# Altium PCB I-RING V1.0.pcbdoc
Units mil, origin at the board's own origin, x right, y up, seen from the top; angles counter-clockwise.
Board outline 1170.48 x 1480.27 mil, 2 copper layers (Top Layer, Bottom Layer); 42 components, 29 nets, 170 pads, 57 vias.
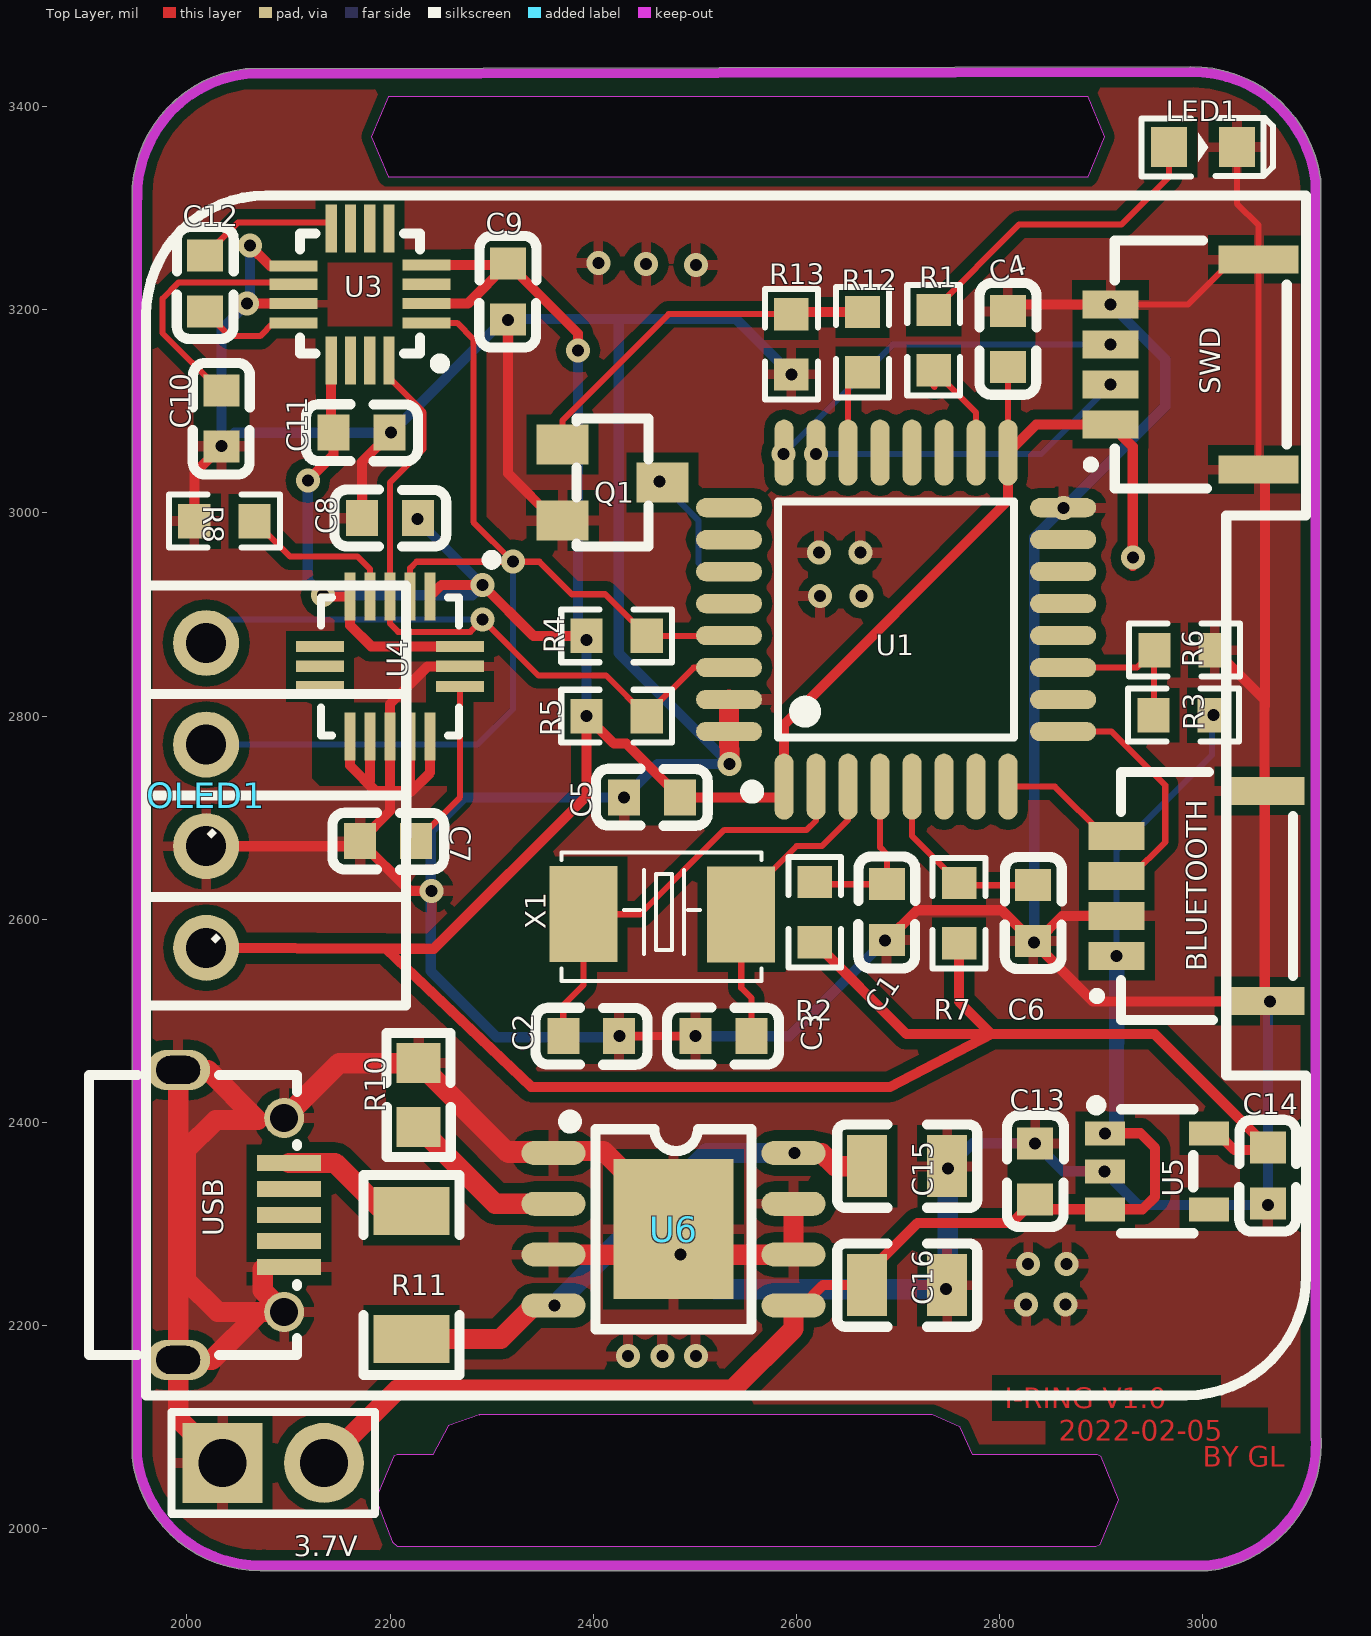
[diagram p0: Top Layer view]
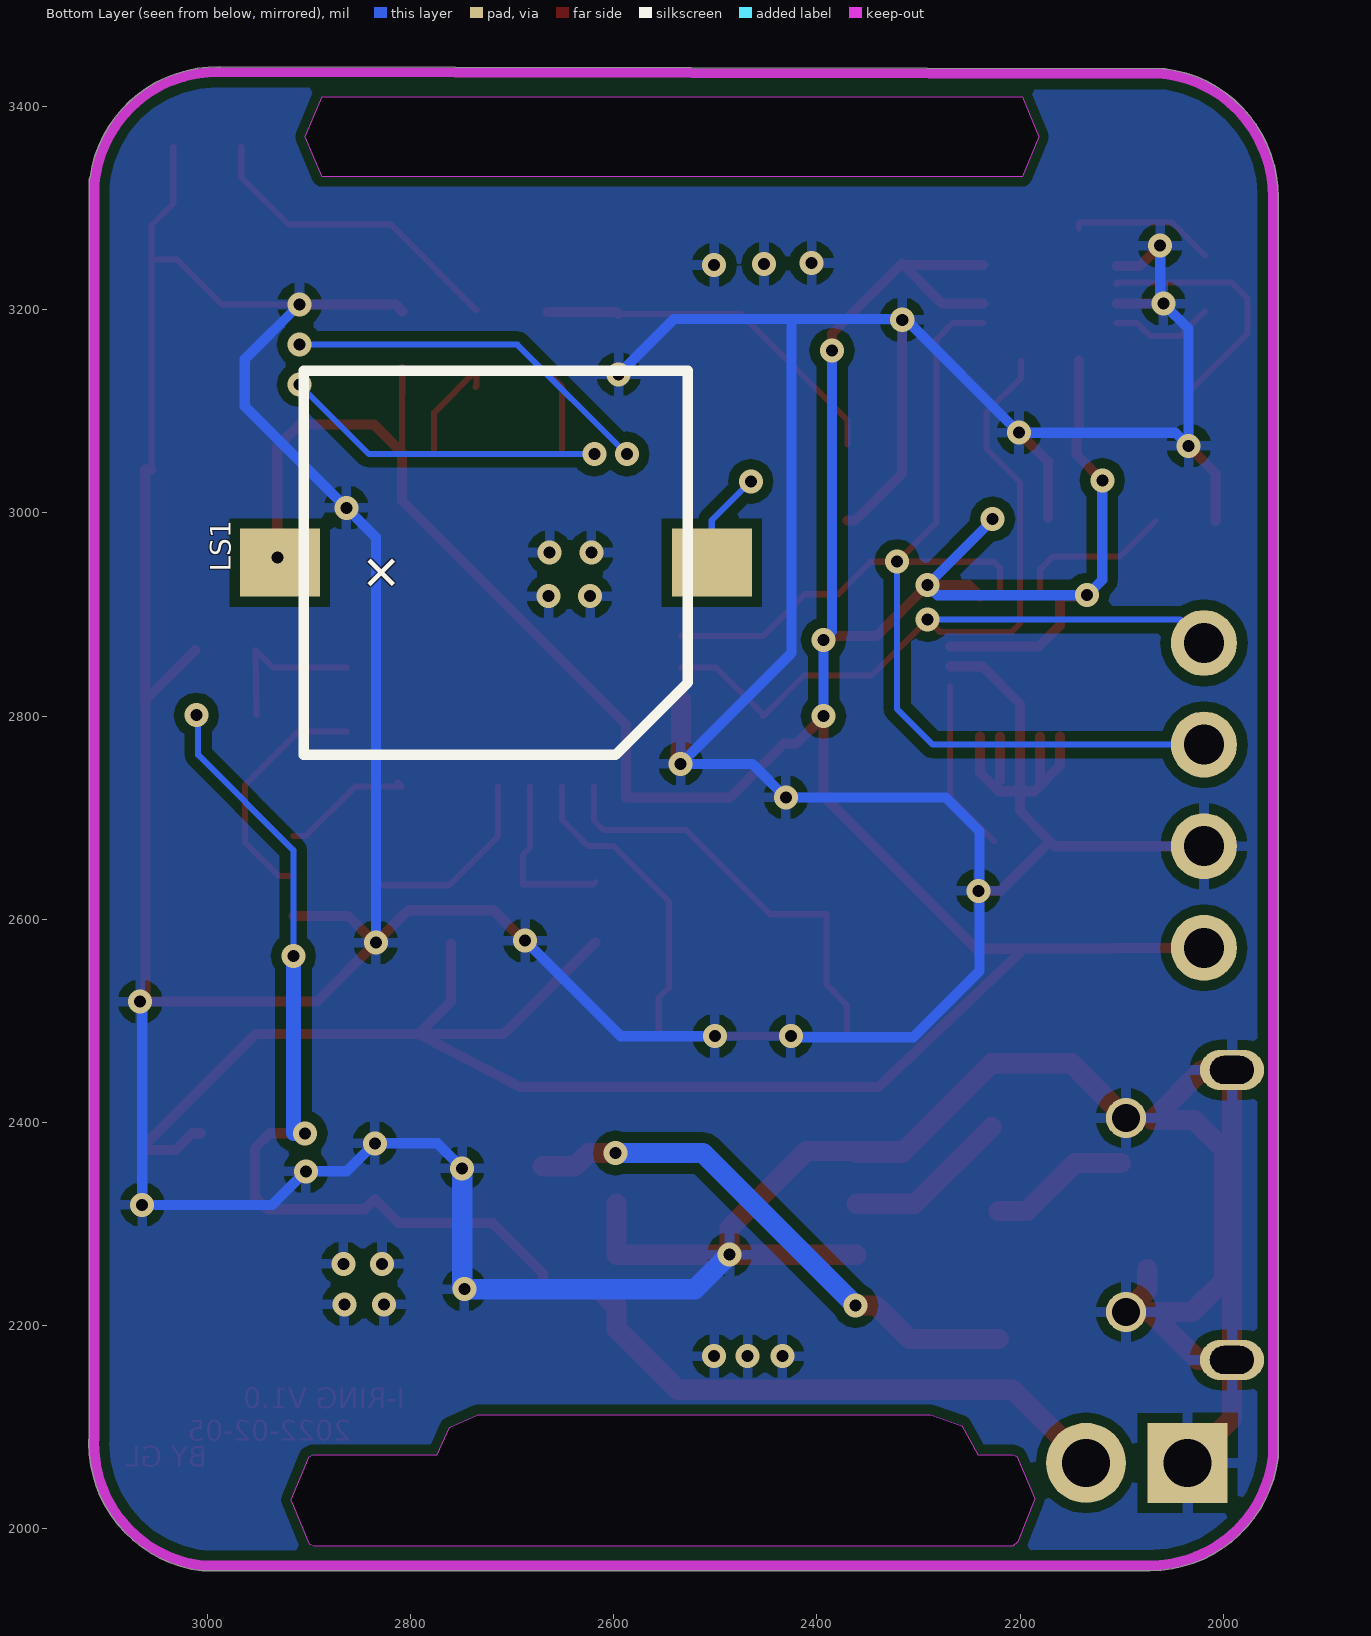
[diagram p1: Bottom Layer view, seen from below]

## Layer stack, top to bottom
Top Solder: solder mask 0.4, Solder Resist, Dk 3.5
Top Layer: signal copper 1.4
Dielectric1: dielectric 12.6, FR-4, Dk 4.8
Bottom Layer: signal copper 1.4
Bottom Solder: solder mask 0.4, Solder Resist, Dk 3.5

## Board outline
1946.02,2070.4 ccw(c2071.57,2085.53) 2072.05,1959.08 ccw(c2073,1964) 2073,1958.98 3004.54,1958.76 ccw(c3004.54,1963.77) 3004.54,1958.76 ccw(c3004.54,1963.77) 3005.14,1958.79 ccw(c2990.01,2084.34) 3116.47,2084.34 ccw(c2990.01,2084.34) 3116.42,2087.95 ccw(c3111.4,2087.81) 3116.01,2089.78 3116.01,3327.8 ccw(c3111,3327.8) 3115.36,3330.29 ccw(c2990.14,3312.59) 2988.19,3439.03 ccw(c2988.26,3434.02) 2988.04,3439.03 2059.22,3437.02 ccw(c2057.97,3432.16) 2057.37,3437.14 ccw(c2072.5,3311.6) 1946.05,3310.79 ccw(c1951,3310) 1945.98,3310 1945.98,2071 ccw(c1951,2071)
cut-out: 2202.05,1987.16 2207,1982.99 2894.72,1982.99 2898.83,1985.14 2899.52,1985.72 2917.3,2028.63 2899.78,2071.29 2895.97,2073.04 2773.56,2073.04 2761.15,2100.22 2733.87,2112.4 2733.13,2112.39 2288.01,2112.39 2288.08,2112.39 2257.35,2101.55 2241.75,2073.02 2207,2073.02 2203.45,2071.55 2185.68,2029.64
cut-out: 2198,3331 2886.98,3331 2903.28,3370.37 2886.98,3409.74 2198,3409.74 2181.69,3370.37

## Design rules (kind name [scope] priority, off if disabled: settings)
Clearance [All] p1: gap=10
PolygonConnect [All] p1: connectstyle=Relief reliefconductorwidth=10 reliefentries=4 polygonreliefangle="90 Angle" airgapwidth=10
RoutingVias [All] p1: holewidth=28 width=50 viastyle="Through Hole" minholewidth=28 minwidth=50 maxholewidth=28 maxwidth=50
SolderMaskExpansion [All] p1: expansion=4
Width [All] p1: maxlimit=10 minlimit=10 preferedwidth=10
30 further rules are at their usual default settings.

## Components (designator, comment, footprint, x,y, rotation, side; value= is the part's Value field where it differs from the comment)
3.7V "3.7V 400mAH" HDR-TH_2P-P2.54-V-M 2085,2065 r0 top
BLUETOOTH "BLUETOOTH" CONN-SMD_SH1.0X4 2988,2623.01 r90 top
C1 "104" C0603 2689,2607 r90 top
C2 "20pF" C0603 2398,2485 r180 top
C3 "20pF" C0603 2528,2485 r0 top
C4 "104" C0603 2808,3171 r270 top
C5 "104" C0603 2458,2720 r0 top
C6 "104" C0603 2833,2606 r270 top
C7 "104" C0603 2198,2677 r180 top
C8 "104" C0603 2200,2995 r180 top
C9 "0.1u" C0603 2316,3218 r90 top
C10 "4.7uF" C0603 2034,3093 r90 top
C11 "104" C0603 2172,3079 r180 top
C12 "0.22uF" C0603 2018,3226 r270 top
C13 "104" C0603 2835,2352 r270 top
C14 "104" C0603 3064,2348 r90 top
C15 "10uF" C0805 2709,2357 r0 top
C16 "10uF" C0805 2709,2240 r0 top
LED1 "LED-0603_B" LED0603_BLUE 3000,3360 r0 top
LS1 "BEEP" HN9650B 2527,2762 r270 bottom
OLED1 "0.96OLED_4P_MODULE_JX" 0.96OLED_4P 2019,2722 r90 top
Q1 "j3y" J3Y 2419,3030 r180 top
R1 "4.7K" R0603#1 2735,3170 r270 top
R2 "10K" R0603#1 2618,2607 r270 top
R3 "10K" R0603#1 2981,2801 r0 top
R4 "4.7K" R0603#1 2423,2879 r0 top
R5 "4.7K" R0603#1 2423,2800 r0 top
R6 "10K" R0603#1 2982,2865 r180 top
R7 "0" R0603#1 2760,2606 r270 top
R8 "4.7k" R0603#1 2037,2992 r180 top
R10 "4.7K" R0603#2 2228,2427 r270 top
R11 "0.25" R1206 2221,2250 r270 top
R12 "4.7k" R0603#1 2665,3168 r270 top
R13 "4.7k" R0603#1 2595,3166 r270 top
SWD "SWD" CONN-SMD_SH1.0X4 2982,3146.01 r90 top
U1 "STM32F030K6T6TR" LQFP-32_L7.0-W7.0-P0.80-LS9.0-TL 2698,2895 r90 top
U3 "C-HMC5883L" HMC 2169,3217 r180 top
U4 "ICM-20602" LGA-16_L3.0-W3.0-ICM20602 2200,2849 r180 top
U5 "RT9013-33GB" SOT-23-5_L3.0-W1.7-P0.95-LS2.8-BR 2955.01,2351.99 r180 top
U6 "TP4056X" SOP-8_L4.9-W3.9-P1.27-LS6.0-BL-EP 2479,2295 r270 top
USB "MICRO XNJ ZB" MICRO-USB-SMD_MICRO-XNJ-ZB 2046,2309 r90 top
X1 "8MHz" SMD-5032_2P 2468,2605 r0 top

## Footprints (in the part's own frame and the unit in brackets; to place one, negate y for a bottom-side part, rotate by r counter-clockwise, add the part's x,y. Pads: shape width x height; smd on the part's side, far side on the other; paste and mask are expansions set on the pad)
0.96OLED_4P [mm]
  round 1.65 hole 1: 1(-3.81,-0.001) 2(-1.27,0.002) 3(1.27,0.002) 4(3.81,0.002)
  silkscreen extent -15,-27.5 15,1.5
C0603 [mm]
  rect 0.8x0.9 smd: 1(-0.7,0) 2(0.7,0)
  silkscreen extent -1.41,-0.71 1.39,0.72
C0805 [mm]
  rect 1x1.55 smd: 1(-1,0) 2(1,0)
  silkscreen extent -1.75,-1.04 1.75,1.04
CONN-SMD_SH1.0X4 [mm]
  rect 0.7x1.4 smd: 1(-1.5,1.85) 2(-0.5,1.85) 3(0.5,1.85) 4(1.5,1.85)
  rect 0.7x2 smd: 5(-2.625,-1.85) 6(2.625,-1.85)
  silkscreen extent -3.1,-2.55 3.1,2.42
HDR-TH_2P-P2.54-V-M [mm]
  rect 2x2 hole 1.2: 1(-1.27,0)
  round 2 hole 1.2: 2(1.27,0)
  silkscreen extent -2.54,-1.27 2.54,1.27
HMC [mm]
  rect 1.2x0.28 smd: 1(-1.702,0.762) 2(-1.702,0.279) 3(-1.702,-0.203) 4(-1.702,-0.686) 9(1.626,-0.66) 10(1.626,-0.203) 11(1.626,0.279) 12(1.626,0.762)
  rect 0.28x1.2 smd: 5(-0.762,-1.6) 6(-0.279,-1.6) 7(0.203,-1.6) 8(0.686,-1.6) 13(0.686,1.702) 14(0.203,1.702) 15(-0.279,1.702) 16(-0.762,1.702)
  silkscreen extent -2.16,-1.47 1.47,1.9
HN9650B [mm]
  rect 1.7x2 smd: 1(-4.8,-10.2) 2(-4.8,0.6)
  silkscreen extent -9.6,-9.6 0,0
J3Y [mm]
  rect 1.3x1 smd: 1(1.25,-0.95) 2(1.25,0.95) 3(-1.25,0)
  silkscreen extent -0.9,-1.6 0.9,1.6
LED0603_BLUE [mm]
  rect 0.9x1 smd: 1(-0.85,0) 2(0.85,0)
  silkscreen extent -1.54,-0.73 1.75,0.73
LGA-16_L3.0-W3.0-ICM20602 [mm]
  rect 0.28x1.2 smd: 1(-1,-1.75) 2(-0.5,-1.75) 3(0,-1.75) 4(0.5,-1.75) 5(1,-1.75) 9(1,1.75) 10(0.5,1.75) 11(0,1.75) 12(-0.5,1.75) 13(-1,1.75)
  rect 1.2x0.28 smd: 6(1.75,-0.5) 7(1.75,0) 8(1.75,0.5) 14(-1.75,0.5) 15(-1.75,0) 16(-1.75,-0.5)
  silkscreen extent -2.66,-2.79 1.73,1.73
LQFP-32_L7.0-W7.0-P0.80-LS9.0-TL [mm]
  oval 1.65x0.48 smd: 1(-4.176,2.799) 2(-4.176,2) 3(-4.176,1.2) 4(-4.176,0.4) 5(-4.176,-0.4) 6(-4.176,-1.2) 7(-4.176,-2) 8(-4.176,-2.799) 17(4.176,-2.799) 18(4.176,-2) 19(4.176,-1.2) 20(4.176,-0.4) 21(4.176,0.4) 22(4.176,1.2) 23(4.176,2) 24(4.176,2.799)
  oval 0.48x1.65 smd: 9(-2.799,-4.176) 10(-2,-4.176) 11(-1.2,-4.176) 12(-0.4,-4.176) 13(0.4,-4.176) 14(1.2,-4.176) 15(2,-4.176) 16(2.799,-4.176) 25(2.799,4.176) 26(1.999,4.176) 27(1.199,4.176) 28(0.399,4.176) 29(-0.399,4.176) 30(-1.199,4.176) 31(-1.999,4.176) 32(-2.799,4.176)
  silkscreen extent -4.45,-2.95 2.95,3.75
MICRO-USB-SMD_MICRO-XNJ-ZB [mm]
  rect 0.4x1.6 smd: 1(1.3,-1.388) 2(0.65,-1.388) 3(0,-1.388) 4(-0.65,-1.388) 5(-1.3,-1.388)
  oval 1x1.6 hole 0.7 slot 1.1 at 90 deg: 6(-3.625,1.388) 6(3.625,1.388)
  round 1 hole 0.7: 6(-2.425,-1.262) 6(2.425,-1.262)
  silkscreen extent -3.5,-1.59 3.5,3.62
R0603#1 [mil]
  rect 31.75x34.02 smd: 1(-29.66,0) 2(29.66,0)
  silkscreen extent -55,-26 55,26
R0603#2 [mil]
  rect 39.37x43.31 smd: 1(-31.49,0) 2(31.49,0)
  silkscreen extent -61,-31 61,32
R1206 [mm]
  rect 1.2x1.9 smd: 1(-1.6,0) 2(1.6,0)
  silkscreen extent -2.5,-1.2 2.5,1.2
SMD-5032_2P [mm]
  rect 1.7x2.4 smd: 1(-1.971,0) 2(1.971,0)
  silkscreen extent -2.52,-1.67 2.48,1.55
SOP-8_L4.9-W3.9-P1.27-LS6.0-BL-EP [mm]
  oval 0.6x1.6 smd: 1(-1.905,-3) 2(-0.635,-3) 3(0.635,-3) 4(1.905,-3) 5(1.905,3) 6(0.635,3) 7(-0.635,3) 8(-1.905,3)
  rect 3.5x3 smd: 9(0,0)
  silkscreen extent -2.84,-2.74 2.5,1.95
SOT-23-5_L3.0-W1.7-P0.95-LS2.8-BR [mm]
  rect 1x0.6 smd: 1(1.3,-0.95) 2(1.3,0) 3(1.3,0.95) 4(-1.3,0.95) 5(-1.3,-0.95)
  silkscreen extent -0.9,-1.78 1.65,1.55

## Via types
v1: diameter 23.62, hole 11.81, Top Layer to Bottom Layer, 55 vias
v2: diameter 24, hole 12, Top Layer to Bottom Layer, 2 vias

## Nets (pads, with @x,y where several pads share a name; then routed paths per layer and width w, separated by ;. In a path a pad name is that pad's centre, name@x,y a point inside that pad or via, vN(x,y) a via of type N, cw(c..) or ccw(c..) an arc to the next point about the centre after c; other vN are vias at no path point)
+3.3V: C4.2 C5.2 C8.1 C9.2 C11.2 C14.2 LS1.1 OLED1.1 R2.2 R4.1 R5.1 R7.2 SWD.1 U1.1 U1.17 U3.2 U3.4 U3.13 U4.1 U4.5 U4.16 U5.5 | length 4386.7
  Top Layer w6: C4.2 2808,3116.2 2808.2,3116 U1.17
  Top Layer w10: OLED1.1@2019.1,2572 2196,2571 ; v1(2119,3032) 2144.44,3057.44 C11.2 2142,3081.44 U3.13 ; v1(2134,2919) 2135.1,2917.9 U4.5 2160.63,2889.37 2181.32,2868.68 U4.16 ; U3.2 2276.44,3206 C9.2 ; U3.4 2314.44,3244 C9.2 ; U4.1 2250.47,2929 v1(2291,2929) 2341,2879 R4.1@2393.35,2879 ; v1(2385,3160) 2385,3176.56 C9.2 ; R2.2 2708.34,2487 2792,2487 ; R7.2 2760,2519 2792,2487 ; v1@2931,2948 2931,3065.11 2909.16,3086.95 2835.74,3086.95 U1.17 2808.2,3012.2 2587.8,2791.8 U1.1 2587.8,2720 C5.2 2432.6,2773 2420.3,2773 v1(2393.34,2800) 2393.3,2721.3 2243,2571 2196,2571 ; U5.5 3014.6,2389.4 3031,2373 3061.44,2373 C14.2 2952.56,2487 2792,2487 ; 2196,2571 2339,2435 2692,2435 2792,2487
  Bottom Layer w10: v1(2119,3032) 2119,2934 v1(2134,2919) 2281,2919 v1(2291,2929) 2227,2993 v1(2227,2994) ; v1(2385,3160) 2385,2883.34 v1(2393.34,2875) v1(2393.34,2800)
  other v1: 2931,2955.98
+5V: R11.1 USB.1 | length 139.9
  Top Layer w20: USB.1 2145.82,2360.18 2193.01,2312.99 R11.1
ADC_IN: R3.1 R6.2 U1.11 | length 161.1
  Top Layer w6: U1.11 2935.11,2847.76 R6.2 ; R3.1@2951.4,2801 R6.2
BEEP: R12.2 U1.22 | length 84.8
  Top Layer w6: U1.22 2650.76,3124.1 R12.2
C7_1: C7.1 U4.14 | length 170.3
  Top Layer w6: C7.1 2268.9,2720.34 U4.14
C10_2: C10.2 U3.10 | length 253
  Top Layer w6: C10.2 2032.4,3120.6 1976,3177 1976,3211 1992,3227 2105,3227 U3.10
C12_1: C12.1 U3.8 | length 143.4
  Top Layer w6: C12.1 2050.4,3286 2142,3286 U3.8
C12_2: C12.2 U3.12 | length 118.6
  Top Layer w6: C12.2@2029.4,3187 C12.2 2042.4,3174 2072,3174 2085,3187 U3.12
FOSC1: C2.2 U1.2 X1.1 | length 428.7
  Top Layer w6: C2.2 2370.44,2515.44 2390.41,2535.41 X1.1 2446,2605 2529,2688 2610,2688 2619.3,2697.3 U1.2
FOSC2: C3.2 U1.3 X1.2 | length 308
  Top Layer w6: C3.2 2555.6,2522.6 2545.6,2532.5 X1.2 2545.6,2617.6 2600,2672 2625,2672 2650.8,2697.8 U1.3
GND: 3.7V.1 BLUETOOTH.2 BLUETOOTH.5 BLUETOOTH.6 C1.1 C2.1 C3.1 C4.1 C5.1 C6.2 C7.2 C8.2 C9.1 C10.1 C11.1 C13.1 C14.1 C15.2 C16.2 LED1.2 OLED1.2 Q1.2 R6.1 R8.2 R10.1 R13.2 SWD.4 SWD.5 SWD.6 U1.16 U1.31 U1.32 U3.9 U3.11 U4.9 U4.10 U4.11 U4.12 U4.13 U4.15 U5.2 U6.1 U6.3 U6.6 U6.7 U6.9 USB.5 USB.6 | length 8818
  Top Layer w6: v1(2909.2,3205.1) 2985.07,3205.07 3029.36,3249.36 SWD.6 ; LED1.2 3033.46,3304.54 3054.84,3283.16 SWD.6 ; SWD.5 SWD.6
  Top Layer w8: v1(2425.56,2485) v1(2500.44,2485)
  Top Layer w10: R8.2 2007.34,3038.78 C10.1 ; OLED1.2 2165.44,2672 C7.2 2219.44,2628 v1(2241,2628) ; v1(2059,3206) U3.11 ; v1(2062,3263) 2082,3243 U3.9 ; U4.9 2160.6,2751.4 2186,2726 2221,2726 2239.4,2744.4 U4.13 ; C7.2 2200,2706.6 2200,2736 U4.11 2200,2812 2237,2849 U4.15 ; C8.2 2172.44,3050.44 v1(2201,3079) ; 2180.31,2736 U4.10 ; 2219.68,2736 U4.12 ; C9.1 2316,3039 2362.4,2992.6 Q1.2 ; C1.1 2718.56,2609 2802,2609 v1(2834,2577) 2892,2519 v1(3066,2519) ; C4.1 2814.54,3205.1 v1(2909.2,3205.1) ; C6.2 2836.44,2578.44 2861.32,2603.32 BLUETOOTH.2 ; U1.16 2862.8,3005.2 v1(2863,3005) ; R6.1 3060.8,2815.8 BLUETOOTH.6@3060.8,2726.3 ; SWD.5@3055,3042.8 3061,3042.8 3061,2810 ; BLUETOOTH.5@3060.84,2519.65 BLUETOOTH.6
  Top Layer w20: 3.7V.1 1991.37,2108.63 USB.6@1991.37,2166.28 ; 2069.7,2211.53 2024.45,2166.28 USB.6@1991.37,2166.28 ; USB.5@2074.62,2255.82 2074.62,2234.61 2095.7,2213.53 2030.47,2213.53 1999,2245 1999,2373 2028.47,2402.47 2069.7,2402.47 2020.45,2451.72 1991.37,2451.72 1991.37,2190.28 USB.6@1991.37,2166.28 ; USB.6@2095.7,2404.47 2149.72,2458.49 R10.1 2316.49,2370 U6.1 ; 2316.9,2372 2410,2372 2486,2296 v1(2486,2270) ; U6.3 v1(2486,2270) ; U1.31 U1.32 v1(2534,2753) ; U6.7 U6.6 v1(2486,2270)
  Bottom Layer w10: v1(2062,3263) 2062,3209 v1(2059,3206) 2034,3181 v1(2034,3066) 2047,3079 v1(2201,3079) 2312,3190 v2(2316,3190) 2317,3191 2426,3191 ; v1(2425.56,2485) 2424.56,2484 2305,2484 2240,2549 2240,2687 2273,2720 v1(2430.44,2720) 2463.44,2753 v1(2534,2753) 2425,2862 2425,3191 2426,3191 ; v1(2500.44,2485) 2593,2485 v1(2687,2579) ; v1(2595,3136.34) 2540.34,3191 2426,3191 ; v1(2749,2355) 2773.56,2379.56 v1(2835,2379.56) 2862.56,2352 v1(2903,2352) 2936,2319 v1(3064,2319) 3064,2517 v1(3066,2519) ; 2834,2626 v1(2834,2577) 2834,2976 v1(2863,3005) 2963,3105 2963,3151.3 v1(2909.2,3205.1)
  Bottom Layer w20: v1(2486,2270) 2520,2236 v1(2747,2236) 2749,2238 v1(2749,2355)
  other v1: 2434,2170 2468,2170 2501,2170 2826,2221 2865,2221 2828,2261 2866,2261 2623,2918 2664,2918 2622,2961 2663,2961 2501,3244 2452,3245 2405,3246
  other v2: 2316,3190
LED: R1.2 U1.18 | length 115
  Top Layer w6: 2736,3124 2735,3125 R1.2 2776.74,3098.6 U1.18
LED1_1: LED1.1 R1.1 | length 315.2
  Top Layer w6: R1.1 2819.3,3284 2920,3284 2966.5,3330.5 LED1.1
LS1_2: LS1.2 Q1.3 | length 95.9
  Bottom Layer w6: v1(2465,3031) 2503.4,2992.6 LS1.2
NRST: C1.2 R2.1 U1.4 | length 170.7
  Top Layer w6: R2.1 2620.1,2634.56 C1.2 2689,2664 2682.25,2670.75 U1.4@2682.25,2730.6
NULL: 
Q1_1: Q1.1 R12.1 R13.1 | length 363.1
  Top Layer w6: Q1.1 2369.8,3091.1 2474.3,3195.7 R13.1
  Top Layer w10: R13.1 2597,3197.66 R12.1
RXD: BLUETOOTH.3 U1.9 | length 269.9
  Top Layer w6: U1.9@2892.2,2784.8 U1.9 2910.2,2784.8 2963,2732 2963,2676 2929.69,2642.69 BLUETOOTH.3
S$20193: 
SCL: OLED1.3 R4.2 U1.29 U3.1 U4.2 | length 1124.1
  Top Layer w6: U4.2 2219.68,2945.68 2226,2952 v1(2321,2952) ; U3.1 2266,3187 2282,3171 2282,2991 v1(2321,2952) ; R4.2 2533.3,2879 U1.29 ; R4.2 2411.7,2920 2379,2920 2347,2952 v1(2321,2952)
  Bottom Layer w6: OLED1.3 2286,2772 2321,2807 v1(2321,2952)
SDA: OLED1.4 R5.2 U1.30 U3.16 U4.3 | length 970.4
  Top Layer w6: U3.16 2199,3133 2233,3099 2233,3063 2200,3030 U4.3 2200,2891 2208,2883 2279,2883 v1(2291,2895) 2346,2840 2412.7,2840 R5.2 ; R5.2 2452.66,2801.66 2498.8,2847.8 U1.30
  Bottom Layer w6: OLED1.4 2041.95,2895 v1(2291,2895)
SWCLK: SWD.3 U1.24 | length 366.8
  Bottom Layer w6: v1(2587,3058) 2694.7,3165.7 v1(2909.17,3165.69)
SWDIO: SWD.2 U1.23 | length 318.5
  Bottom Layer w6: v1(2619,3058) 2840.84,3058 v1(2909.17,3126.32)
TXD: BLUETOOTH.4 U1.8 | length 133.3
  Top Layer w6: U1.8@2812.61,2735 U1.8 2854.41,2730.59 2902.94,2682.06 BLUETOOTH.4
U1_5: C6.1 R7.1 U1.5 | length 188
  Top Layer w6: U1.5 2713.75,2681.91 R7.1 2762.1,2633.56 C6.1
U4_4: R8.1 U4.4 | length 160
  Top Layer w6: R8.1 2101.7,2957 2168,2957 2180.3,2944.7 U4.4
U6_2: R10.2 U6.2 | length 164.2
  Top Layer w20: R10.2 2303.5,2320 U6.2
U6_4: C15.1 R11.2 U6.4 U6.8 | length 528.7
  Top Layer w20: R11.2 2309.01,2187 2342.01,2220 U6.4 ; v1(2598,2370) 2625,2370 2638,2357 C15.1
  Bottom Layer w20: v1(2362,2220) 2512,2370 v1(2598,2370)
VBAT: 3.7V.2 BLUETOOTH.1 C13.2 C16.1 R3.2 U5.1 U5.3 U6.5 | length 1520.8
  Top Layer w10: U6.5 2606,2220 2626,2240 C16.1 ; C16.1 2669.6,2251.6 2719,2301 2811.6,2301 C13.2 ; C13.2 2844.84,2314.6 U5.3 2940.6,2314.6 2953,2327 2953,2375 2938.6,2389.4 v1(2903.8,2389.4)
  Top Layer w20: 3.7V.2 2207,2137 2537,2137 2597.11,2197.11 U6.5
  Bottom Layer w6: v1(2915.17,2563.94) 2915.16,2668.16 3009,2762 3009,2795 v1@3014,2800
  Bottom Layer w15: v1(2903.8,2389.4) 2915,2389.4 v1(2915.17,2563.94)
  other v1: 3010.66,2801
pads on no net: U1.6 U1.7 U1.10 U1.12 U1.13 U1.14 U1.15 U1.19 U1.20 U1.21 U1.25 U1.26 U1.27 U1.28 U3.3 U3.5 U3.6 U3.7 U3.14 U3.15 U4.6 U4.7 U4.8 U5.4 USB.2 USB.3 USB.4

## Polygon pours and split planes (outlines as drawn)
GND on Bottom Layer "Top Layer-No Net" (solid, remove dead copper, pour order 4): 1610,3555 1575,3520 1575,1915 1675,1815 3430,1815 3430,3475 3360,3545
GND on Top Layer "Top Layer-No Net" (solid, remove dead copper, pour order 6): 1440,3530 1370,3460 1370,1785 3595,1785 3680,1700 3635,1745 3635,3580

## Keep-outs
Keep-Out Layer:
  lines w10: 1951,2071 ccw(c2071.57,2085.53) 2073.45,1964.1 ; 1951.07,3309.71 cw(c2072.5,3311.6) 2057.97,3432.16 ; 2988.26,3434.02 cw(c2990.14,3312.59) 3110.71,3327.12 ; 3004.54,1963.77 ccw(c2990.01,2084.34) 3111.4,2087.81

## Other copper
Top Layer:
  pour cut-out: 2122,2812 2123,2811 2123,2739 2131,2731 2274,2731 2277,2734 2277,2812
  text "I-RING V1.0" at 2805,2119 h20
  text "2022-02-05" at 2858,2087 h20
  text "BY GL" at 3000,2061 h20

## Silkscreen, mask and mechanical layers (free items; w line width, h text height)
Document:
  lines w10: 2207,1988 2894.72,1988 2895.97,1989.26 ; 2207,1989.26 cw(c2246.37,2028.63) 2207,2068 2246.37,2068 cw(c2286.84,2066.9) 2287.94,2107.37 2733.57,2107.37 ; 2733.57,2107.39 cw(c2731.39,2070.21) 2768.57,2068.02 2895.97,2068.02 ; 2895.97,1989.26 ccw(c2856.6,2028.63) 2895.97,2068 ; 2198,3331 cw(c2237.37,3370.37) 2198,3409.74 2886.97,3409.74 cw(c2847.61,3370.37) 2886.98,3331 2198,3331

## Text inside footprints (layer, text, board x,y; h text height)
LS1: Bottom Overlay "+" at 2832.86,2912.86 h40 r315